# Altium PCB PCBtodojunto.PcbDoc (part 2 of 2)
Units mm, origin at the board's own origin, x right, y up, seen from the top; angles counter-clockwise.
Board outline 200 x 200 mm, 2 copper layers (Top Layer, Bottom Layer); 188 components, 125 nets, 535 pads, 86 vias.
Unrouted connection lines stored in the file: 1.
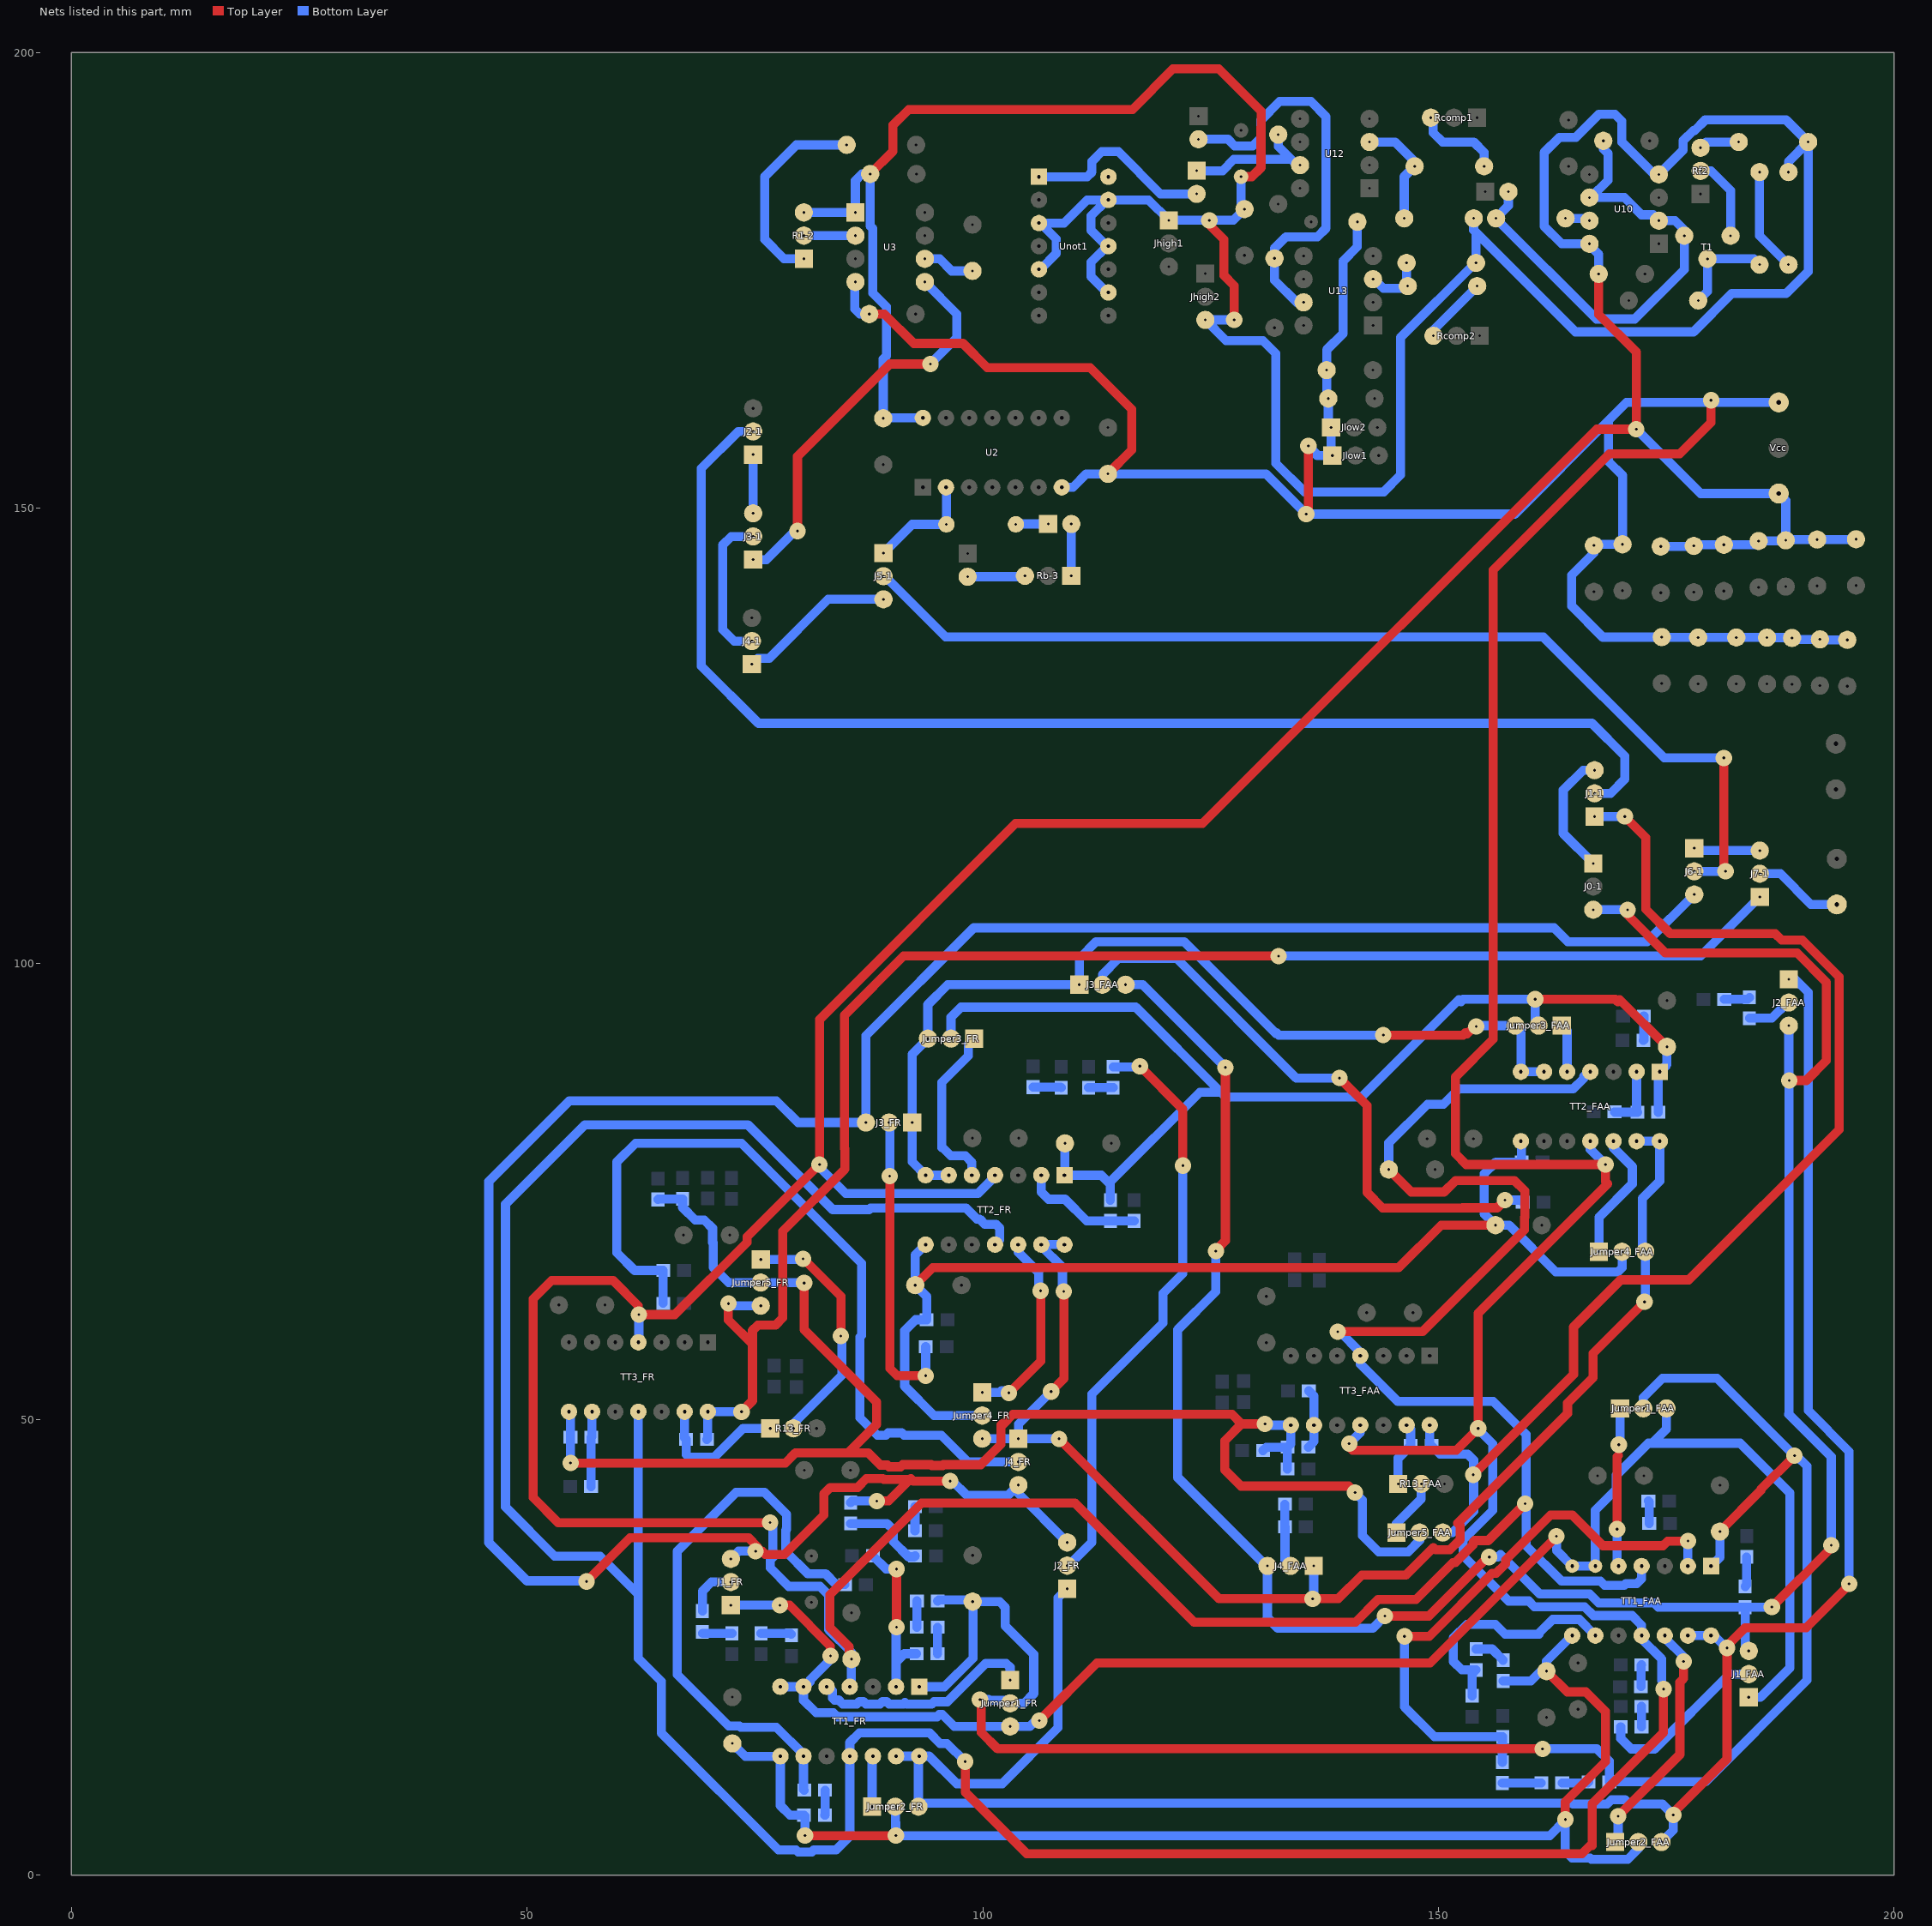
[diagram p2: the nets of this part, all layers, seen from the top]

## Via types
v1: diameter 1.8, hole 0.3, Top Layer to Bottom Layer, 86 vias

## Nets (pads, with @x,y where several pads share a name; then routed paths per layer and width w, separated by ;. In a path a pad name is that pad's centre, name@x,y a point inside that pad or via, vN(x,y) a via of type N, cw(c..) or ccw(c..) an arc to the next point about the centre after c; other vN are vias at no path point) (continued)
NetCf_1: Cf.1 Jsierra.2 R3.1 T1.2 U10.2 U10.6 | length 54.5
  Bottom Layer w1: Jsierra.2@157.684,184.726 157.684,183.202 156.287,181.805 167.336,170.756 171.547,170.756 176.988,176.197 T1.2@176.988,179.9 176.988,180.535 175.972,181.551 U10.2@174.194,181.551 173.554,182.191 172.294,182.191 170.394,184.091 U10.6@166.721,184.091 ; U10.6@166.574,184.091 U10.6@166.721,184.091 ; Cf.1@168.098,190.314 168.098,189.425 168.606,188.917 168.606,185.976 U10.6@166.721,184.091
NetCh_1: Ch.1 U3.6 | length 5.8
  Bottom Layer w1: U3.6@93.65,177.366 95.27,177.366 96.6,176.036 Ch.1@98.88,176.036
NetD1_2: D1.2 D2.1 | length 11.5
  Bottom Layer w1: D2.1@185.243,186.885 185.243,179.9 D1.2@188.418,176.725
NetD2_2: D2.2 Rd.2 T1.1 | length 11
  Bottom Layer w1: Rd.2@178.512,172.788 179.528,173.804 T1.1@179.528,177.36 184.608,177.36 D2.2@185.243,176.725
NetJ0-1_1: J0-1.1 J1-1.3 | length 13.8
  Bottom Layer w1: J0-1.1@167,111.02 163.71,114.31 163.71,119.08 165.88,121.25 J1-1.3@167.14,121.25
NetJ1-1_2: J1-1.2 J2-1.2 | length 141
  Bottom Layer w1: J2-1.2@74.81,158.42 73.18,158.42 69.11,154.35 69.11,132.68 75.4,126.39 166.86,126.39 170.47,122.78 170.47,120.28 168.9,118.71 J1-1.2@167.14,118.71
NetJ1-3_2: J1-3.2 Rb-3.3 | length 6.3
  Bottom Layer w1: J1-3.2@98.344,142.48 104.534,142.48 Rb-3.3@104.634,142.58
NetJ1_FAA_2: J1_FAA.2 R6.b_FAA.1 | length 19.2
  Bottom Layer w1: R6.b_FAA.1@170.011,16.277 170.011,15.016 171.17,13.857 173.73,13.857 181.94,22.067 J1_FAA.2@184.06,22.067
NetJ1_FR_2: J1_FR.2 R6.b_FR.1 | length 5.7
  Bottom Layer w1: R6.b_FR.1@69.244,28.977 69.244,31.167 70.244,32.167 J1_FR.2@72.364,32.167
NetJ2-1_1: J2-1.1 J3-1.3 | length 6.4
  Bottom Layer w1: J3-1.3@74.81,149.44 J2-1.1@74.81,155.88
NetJ2-3_1: J2-3.1 R1-3.1 | length 3.6
  Bottom Layer w1: R1-3.1@103.634,148.23 103.674,148.27 J2-3.1@107.184,148.27
NetJ2-3_2: J2-3.2 Rb-3.1 | length 5.7
  Bottom Layer w1: Rb-3.1@109.714,142.58 109.714,148.26 J2-3.2@109.724,148.27
NetJ2_FAA_2: J2_FAA.2 R10.b_FAA.1 | length 5
  Bottom Layer w1: R10.b_FAA.1@184.134,94.034 186.584,94.034 188.307,95.757 J2_FAA.2@188.454,95.757
NetJ2_FR_2: J2_FR.2 R10.b_FR.1 | length 64.8
  Top Layer w1: v1(117.24,88.77) 121.96,84.05 v1(121.96,77.86)
  Bottom Layer w1: J2_FR.2@109.27,33.97 109.417,33.97 111.98,36.533 111.98,52.78 119.79,60.59 119.79,63.85 121.96,66.02 v1(121.96,77.86) ; R10.b_FR.1@114.314,88.697 v1@117.007,88.697
NetJ3-1_2: J3-1.2 J4-1.2 | length 16.7
  Bottom Layer w1: J4-1.2@74.67,135.42 72.73,135.42 71.48,136.67 71.48,145.97 72.41,146.9 J3-1.2@74.81,146.9
NetJ3_FAA_2: J3_FAA.2 R14_FAA.1 | length 65.5
  Top Layer w1: v1(139.15,87.47) 142.17,84.45 142.17,74.92 143.88,73.21 152.66,73.21 152.677,73.227 156.457,73.227 v1(157.3,74.07) v1@157.094,74.07
  Bottom Layer w1: J3_FAA.2@113.14,97.71 113.14,98.82 114.9,100.58 121.29,100.58 134.4,87.47 v1(139.15,87.47) ; v1(157.3,74.07) 159.037,74.07 R14_FAA.1@159.257,73.85
NetJ3_FR_2: J3_FR.2 R14_FR.1 | length 34.6
  Top Layer w1: J3_FR.2@89.724,82.587 J3_FR.2@89.804,82.507 ; v1(89.804,76.717) 89.804,55.597 90.6,54.801 v1(93.748,54.801)
  Bottom Layer w1: J3_FR.2@89.724,82.587 89.804,82.507 v1(89.804,76.717) ; v1(93.748,54.801) R14_FR.1@93.748,57.984
NetJ4-1_1: J4-1.1 J5-1.3 | length 17.4
  Bottom Layer w1: J4-1.1@74.67,132.88 75.31,133.52 76.57,133.52 83.05,140 J5-1.3@89.11,140
NetJ4_FAA_2: J4_FAA.2 R17.b_FAA.1 R17_FAA.1 | length 7
  Bottom Layer w1: R17_FAA.1@133.161,40.707 133.161,38.227 R17.b_FAA.1@133.171,38.217 133.171,34.55 J4_FAA.2@133.784,33.937
NetJ4_FR_2: J4_FR.2 R17.b_FR.1 R17_FR.1 | length 89.3
  Bottom Layer w1: R17_FR.1@64.941,62.747 R17.b_FR.1@64.941,66.357 61.804,66.357 59.854,68.307 59.854,78.267 61.904,80.317 73.534,80.317 86.72,67.13 86.72,59.243 86.53,59.053 86.53,50.19 88.444,48.277 89.361,48.277 89.614,48.53 91.105,48.53 91.359,48.277 95.454,48.277 98.384,45.347 J4_FR.2@103.914,45.347
NetJ5-1_2: J5-1.2 J6-1.2 | length 116.4
  Top Layer w1: v1(181.33,122.6) 181.33,110.33 v1(181.51,110.15)
  Bottom Layer w1: J5-1.2@89.11,142.54 89.257,142.54 95.927,135.87 161.5,135.87 174.77,122.6 v1(181.33,122.6) ; J6-1.2@178.08,110.15 v1(181.51,110.15)
NetJ6-1_1: J6-1.1 J7-1.3 | length 7.3
  Bottom Layer w1: J6-1.1@178.08,112.69 178.34,112.43 J7-1.3@185.27,112.43
NetJcomp1_1: Jcomp1.1 Rup1.1 U12.7 | length 15.4
  Bottom Layer w1: Jcomp1.1@123.47,187.03 126.313,187.03 127.56,188.277 133.847,188.277 ; Rup1.1@132.43,190.994 132.43,189.694 133.847,188.277 ; U12.7@134.824,187.647 134.477,187.647 133.847,188.277
NetJcomp1_2: Jcomp1.2 Unot1.1 | length 21
  Bottom Layer w1: Unot1.1@106.17,186.37 111.457,186.37 111.99,186.903 111.99,188.04 113.07,189.12 114.884,189.12 119.514,184.49 Jcomp1.2@123.47,184.49
NetJcomp2_2: Jcomp2.2 Rup2.1 U13.7 | length 44.6
  Bottom Layer w1: Jcomp2.2@123.68,190.484 126.916,190.484 127.643,189.757 129.633,189.757 130.53,190.654 130.53,192.574 132.583,194.627 136.007,194.627 137.68,192.954 137.68,180.741 136.713,179.774 133.27,179.774 132.02,178.524 Rup2.1@132.02,177.414 132.02,175.034 134.46,172.594 U13.7@135.21,172.594
NetJumper1_FAA_1: Jumper1_FAA.1 TT1_FAA.5 | length 17.2
  Top Layer w1: v1(169.61,37.96) 169.61,45.907 169.764,46.061
  Bottom Layer w1: v1(169.61,37.96) 169.61,34.069 TT1_FAA.5@169.764,33.916 ; v1(169.8,47.23) 169.8,46.946 169.95,46.797 Jumper1_FAA.1@169.95,51.217
NetJumper1_FR_1: Jumper1_FR.1 TT1_FR.5 | length 25.4
  Bottom Layer w1: TT1_FR.5@82.874,20.677 83.08,20.677 83.514,20.243 83.514,19.436 83.733,19.217 84.187,19.217 84.627,18.777 86.201,18.777 86.451,19.027 86.917,19.027 87.167,18.777 88.741,18.777 88.991,19.027 89.457,19.027 89.707,18.777 91.281,18.777 91.471,18.967 91.661,18.777 94.406,18.777 94.656,19.027 96.124,19.027 100.327,23.23 102.58,23.23 103.01,22.8 Jumper1_FR.1@103.01,21.4
NetJumper2_FAA_1: Jumper2_FAA.1 TT1_FAA.12 | length 26.6
  Top Layer w1: v1(169.73,6.477) 176.5,13.247 176.5,21.166 176.91,21.576 v1(176.91,23.44)
  Bottom Layer w1: Jumper2_FAA.1@169.4,3.637 169.73,3.967 v1(169.73,6.477) ; TT1_FAA.12@174.844,26.296 174.844,26.046 176.91,23.98 v1(176.91,23.44)
NetJumper2_FR_1: Jumper2_FR.1 TT1_FR.12 | length 5.6
  Bottom Layer w1: Jumper2_FR.1@87.864,7.517 87.864,12.967 TT1_FR.12@87.954,13.057
NetJumper3_FAA_1: Jumper3_FAA.1 TT2_FAA.5 | length 5.3
  Bottom Layer w1: Jumper3_FAA.1@163.53,93.227 164.134,92.623 TT2_FAA.5@164.134,88.16
NetJumper3_FR_1: Jumper3_FR.1 TT2_FR.5 | length 19.1
  Bottom Layer w1: TT2_FR.5@98.549,76.811 TT2_FR.5@98.812,76.811 98.812,78.218 98.09,78.94 96.49,78.94 95.59,79.84 95.52,79.84 95.52,86.993 98.424,89.897 98.424,91.157 Jumper3_FR.1@99.064,91.797
NetJumper4_FAA_1: Jumper4_FAA.1 TT2_FAA.12 | length 14.5
  Bottom Layer w1: Jumper4_FAA.1@167.62,68.407 167.62,72.197 171.28,75.857 171.28,77.75 169.214,79.816 TT2_FAA.12@169.214,80.54
NetJumper4_FR_1: Jumper4_FR.1 TT2_FR.12 | length 21.5
  Top Layer w1: v1(102.88,52.92) 106.36,56.4 v1(106.36,64.12)
  Bottom Layer w1: Jumper4_FR.1@99.944,52.977 101.887,52.977 102.07,53.16 v1@102.65,53.16 ; TT2_FR.12@103.892,69.191 103.892,68.378 106.14,66.13 106.14,64.34 v1(106.36,64.12)
NetJumper5_FAA_1: Jumper5_FAA.1 R13_FAA.2 | length 6.5
  Bottom Layer w1: Jumper5_FAA.1@145.404,37.597 145.404,38.567 148.124,41.287 R13_FAA.2@148.124,42.937
NetJumper5_FR_1: Jumper5_FR.1 R13_FR.2 | length 26.7
  Top Layer w1: v1(80.3,67.64) 84.44,63.5 v1(84.44,59.17)
  Bottom Layer w1: Jumper5_FR.1@75.644,67.567 v1@80.037,67.567 ; R13_FR.2@79.224,49.027 79.224,49.534 84.54,54.85 v1@84.54,58.98
NetR1-2_1: R1-2.1 R2-2.2 | length 22.5
  Bottom Layer w1: R1-2.1@80.37,177.376 78.2,177.376 76.07,179.506 76.07,186.386 79.55,189.866 R2-2.2@85.07,189.866
NetR1-2_2: R1-2.2 U3.2 | length 5.7
  Bottom Layer w1: R1-2.2@80.37,179.916 86.02,179.916 U3.2@86.03,179.906
NetR1.b_FAA_2: R1.b_FAA.2 R1_FAA.1 | length 2.4
  Bottom Layer w1: R1.b_FAA.2@172.227,20.687 172.227,23.007 R1_FAA.1@172.297,23.077
NetR1.b_FR_2: R1.b_FR.2 R1_FR.1 | length 3.4
  Bottom Layer w1: R1.b_FR.2@75.674,26.54 78.904,26.54 R1_FR.1@79.004,26.44
NetR2.b_FAA_1: R2.b_FAA.1 R2_FAA.2 | length 2.5
  Bottom Layer w1: R2_FAA.2@173.047,41.057 173.147,40.957 R2.b_FAA.1@173.147,38.607
NetR2.b_FR_1: R2.b_FR.1 R2_FR.2 | length 2.6
  Bottom Layer w1: R2_FR.2@92.561,37.787 R2.b_FR.1@92.561,40.437
NetR3.b_FAA_2: R3.b_FAA.2 R3_FAA.1 | length 3.3
  Bottom Layer w1: R3.b_FAA.2@183.664,31.69 183.834,31.86 R3_FAA.1@183.834,34.924
NetR3.b_FR_2: R3.b_FR.2 R3_FR.1 | length 9.4
  Bottom Layer w1: R3.b_FR.2@85.504,38.594 89.497,38.594 90.184,37.907 90.184,36.607 91.864,34.927 92.474,34.927 R3_FR.1@92.574,35.027
NetR3_2: R3.2 U10.7 | length 2.8
  Bottom Layer w1: R3.2@163.907,181.805 R3.2@163.951,181.805 166.32,181.805 U10.7@166.574,181.551
NetR4.b_FAA_1: R4.b_FAA.1 R4_FAA.1 | length 4.3
  Bottom Layer w1: R4_FAA.1@157.02,10.114 161.284,10.114 R4.b_FAA.1@161.297,10.127
NetR4.b_FAA_2: R4.b_FAA.2 R4.c_FAA.1 | length 2.9
  Bottom Layer w1: R4.b_FAA.2@163.583,10.127 166.367,10.127 R4.c_FAA.1@166.477,10.237
NetR4.b_FR_1: R4.b_FR.1 R4_FR.1 | length 2.9
  Bottom Layer w1: R4_FR.1@95.03,24.297 95.047,24.314 R4.b_FR.1@95.047,27.207
NetR4.b_FR_2: R4.b_FR.2 R4.c_FR.1 | length 2.9
  Bottom Layer w1: R4.b_FR.2@92.761,27.207 92.774,27.22 R4.c_FR.1@92.774,30.087
NetR4_FAA_2: R4_FAA.2 R5_FAA.2 TT1_FAA.2 | length 63.7
  Top Layer w1: v1(146.28,26.2) 148.99,26.2 155.9,33.11 156.325,33.11 157.38,34.164 157.38,34.59 162.31,39.52 164.69,39.52 168.05,36.16 174.65,36.16 175.151,36.661 v1(177.384,36.661)
  Bottom Layer w1: v1@146.28,25.98 146.28,18.47 149.566,15.184 R5_FAA.2@157.06,15.184 157.02,15.144 R4_FAA.2@157.02,12.4 ; TT1_FAA.2@177.384,33.916 v1(177.384,36.661)
NetR4_FR_2: R4_FR.2 R5_FR.2 TT1_FR.2 | length 18.6
  Top Layer w1: v1(90.544,27.227) v1(90.544,33.587) v1@90.544,33.707
  Bottom Layer w1: R5_FR.2@87.947,35.047 89.407,33.587 v1(90.544,33.587) ; TT1_FR.2@90.494,20.677 90.494,23.397 ; v1@90.494,27.017 90.494,23.397 ; R4_FR.2@92.744,24.297 91.394,24.297 90.494,23.397
NetR6.b_FAA_2: R6.b_FAA.2 R6_FAA.1 | length 2.2
  Bottom Layer w1: R6.b_FAA.2@172.297,16.277 R6_FAA.1@172.297,18.527
NetR6.b_FR_2: R6.b_FR.2 R6_FR.1 | length 3.2
  Bottom Layer w1: R6.b_FR.2@69.276,26.52 72.464,26.52 R6_FR.1@72.484,26.54
NetR6_2: R6.2 Rcomp2.3 | length 7.7
  Bottom Layer w1: Rcomp2.3@149.46,168.924 149.46,169.574 R6.2@154.26,174.374 R6.2@154.04,174.374
NetR7.b_FAA_1: R7.b_FAA.1 R7_FAA.1 | length 3.5
  Bottom Layer w1: R7.b_FAA.1@154.14,24.81 155.897,24.81 157.1,23.607 R7_FAA.1@157.1,23.59
NetR7.b_FAA_2: R7.b_FAA.2 R8_FAA.2 TT1_FAA.9 | length 26.6
  Bottom Layer w1: R8_FAA.2@153.71,19.68 153.71,22.094 R7.b_FAA.2@154.14,22.524 152.583,22.524 151.65,23.457 151.65,26.037 153.14,27.527 156.25,27.527 157.327,26.45 161.06,26.45 161.06,26.567 162.559,28.066 165.454,28.066 TT1_FAA.9@167.224,26.296
NetR7.b_FR_1: R7.b_FR.1 R7_FR.1 | length 2.7
  Bottom Layer w1: R7_FR.1@82.68,6.587 82.7,6.607 R7.b_FR.1@82.7,9.327
NetR7.b_FR_2: R7.b_FR.2 R8_FR.2 TT1_FR.9 | length 62.8
  Bottom Layer w1: R7.b_FR.2@80.414,9.327 80.334,9.407 TT1_FR.9@80.334,13.057 80.334,13.266 77.36,16.24 73.427,16.24 73.311,16.357 72.123,16.357 66.47,22.01 66.47,35.54 72.94,42.01 76.05,42.01 78.474,39.586 78.474,37.941 78.38,37.848 78.38,35.517 80.807,33.09 82.727,33.09 83.937,31.88 R8_FR.2@84.887,31.88
NetR7_2: R7.2 Rcomp1.3 | length 9.8
  Bottom Layer w1: Rcomp1.3@149.175,192.854 149.429,192.6 149.429,191.203 150.445,190.187 153.874,190.187 155.017,189.044 R7.2@155.017,187.52
NetR9.b_FAA_2: R9.b_FAA.2 R9_FAA.1 | length 2.7
  Bottom Layer w1: R9_FAA.1@172.497,91.597 172.547,91.647 R9.b_FAA.2@172.547,94.277
NetR9.b_FR_2: R9.b_FR.2 R9_FR.1 | length 3.1
  Bottom Layer w1: R9_FR.1@105.534,86.481 108.544,86.481 R9.b_FR.2@108.614,86.411
NetR10.b_FAA_2: R10.b_FAA.2 R10_FAA.1 | length 2.8
  Bottom Layer w1: R10_FAA.1@181.38,96.107 183.921,96.107 R10.b_FAA.2@184.134,96.32
NetR10.b_FR_2: R10.b_FR.2 R10_FR.1 | length 2.7
  Bottom Layer w1: R10_FR.1@111.604,86.411 R10.b_FR.2@114.314,86.411
NetR11_FAA_2: R11_FAA.2 R12_FAA.2 TT2_FAA.2 | length 7
  Bottom Layer w1: R12_FAA.2@169.323,83.757 169.363,83.717 R11_FAA.2@171.847,83.717 171.754,83.81 TT2_FAA.2@171.754,88.16
NetR11_FR_2: R11_FR.2 R12_FR.2 TT2_FR.2 | length 13.3
  Bottom Layer w1: TT2_FR.2@106.432,76.811 106.432,74.966 107.224,74.174 109.034,74.174 111.42,71.788 R11_FR.2@114.004,71.788 114.014,71.798 R12_FR.2@116.615,71.798
NetR13_FAA_1: R13_FAA.1 R15_FAA.1 TT3_FAA.13 | length 7.2
  Bottom Layer w1: R13_FAA.1@145.584,42.937 145.584,45.76 R15_FAA.1@146.961,47.137 146.961,48.929 TT3_FAA.13@146.514,49.376
NetR13_FR_1: R13_FR.1 R15_FR.1 TT3_FR.13 | length 15.4
  Bottom Layer w1: TT3_FR.13@67.292,50.85 67.292,47.986 R15_FR.1@67.451,47.827 67.451,46.14 67.744,45.847 70.514,45.847 73.694,49.027 R13_FR.1@76.684,49.027
NetR19_FAA_2: R19_FAA.2 R21_FAA.1 TT3_FAA.9 | length 6.7
  Bottom Layer w1: R21_FAA.1@135.727,46.967 136.354,47.594 TT3_FAA.9@136.354,49.376 136.354,52.57 R19_FAA.2@135.787,53.137
NetR19_FR_2: R19_FR.2 R21_FR.1 TT3_FR.9 | length 8.4
  Bottom Layer w1: R19_FR.2@57.027,42.637 57.027,48.027 R21_FR.1@57.057,48.057 57.132,48.132 TT3_FR.9@57.132,50.85 TT3_FR.9@57.057,50.775
NetRf1_1: Rf1.1 Rf2.3 | length 4.5
  Bottom Layer w1: Rf2.3@178.766,189.552 179.401,190.187 Rf1.1@182.957,190.187
NetRf2_2: Rf2.2 T1.3 | length 9.1
  Bottom Layer w1: Rf2.2@178.766,187.012 179.909,187.012 182.068,184.853 T1.3@182.068,179.9
Output: J7-1.2 Output.2 | length 9.8
  Bottom Layer w1: J7-1.2@185.27,109.89 187.52,109.89 190.88,106.53 Output.2@193.72,106.53
Output1: J3-1.1 U3.5 | length 44.1
  Top Layer w1: v1(79.68,147.49) 79.68,155.68 89.82,165.82 v1(94.25,165.82)
  Bottom Layer w1: J3-1.1@74.81,144.36 76.25,144.36 v1@79.11,147.22 ; U3.5@93.65,174.826 97.16,171.316 97.16,168.73 v1(94.25,165.82)
Output2: J5-1.1 R1-3.2 U2.2 | length 12.3
  Bottom Layer w1: J5-1.1@89.11,145.08 92.26,148.23 R1-3.2@96.014,148.23 96.014,152.25 U2.2@95.974,152.29
VCC: Unot1.14
Vcc+_FAA: Ccoup1-2.1 Ccoup1-3.1 Ccoup1-4.1 Ccoup1.1 Ccoup2-4.1 Ccoup2.1 Ccoup3-4.1 Ccoup3.1 CD1_FAA.1 CD1_FR.1 CD2_FAA.1 CD2_FR.1 CD3_FAA.1 CD3_FR.1 D1.1 Jhigh1.1 Jhigh2.3 R1-2.3 R4.2 R5.2 Rf1.2 TT1_FAA.4 TT1_FR.4 TT2_FAA.4 TT2_FR.4 TT3_FAA.4 TT3_FR.4 U2.14 U3.1 U10.4 U10.8 Unot1.3 Unot1.5 Unot1.9 Unot1.11 Unot1.13 Vcc.3 | length 919
  Top Layer w1: v1@62.212,61.695 62.212,62.489 59.444,65.257 52.684,65.257 50.664,63.237 50.664,41.447 53.424,38.687 v1(76.674,38.687) ; v1(62.27,61.51) 66.208,61.51 66.211,61.507 74.154,69.45 74.154,70.054 v1(82.09,77.99) 82.09,93.89 103.6,115.4 124.12,115.4 167.39,158.67 v1(171.72,158.67) 171.72,167.14 167.59,171.27 Ccoup1-4.1@167.59,175.709 ; CD1_FR.1@85.594,23.707 85.345,23.955 85.345,25.055 83.23,27.17 83.23,30.76 93.31,40.84 110.12,40.84 123.19,27.77 140.909,27.77 143.384,30.245 147.535,30.245 151.587,34.297 151.851,34.297 153.784,36.23 153.784,36.494 154.005,36.715 155.475,36.715 v1(159.52,40.76) ; Ccoup1-2.1@87.65,186.676 90.16,189.186 90.16,192.04 91.87,193.75 116.43,193.75 120.88,198.2 125.91,198.2 130.55,193.56 130.55,191.801 130.53,191.781 130.53,187.37 129.537,186.377 Ccoup3-4.1@128.347,186.377 ; v1(124.87,181.584) 124.87,181.094 126.46,179.504 126.46,175.554 127.6,174.414 v1(127.6,170.664) ; v1(138.97,59.64) 148.27,59.64 159.444,70.814 159.444,72.16 159.49,72.207 159.49,75.08 158.34,76.23 151.89,76.23 150.63,74.97 147.026,74.97 CD1_FAA.1@144.56,77.437
  Bottom Layer w1: TT3_FR.4@62.212,58.47 62.084,58.598 62.27,58.784 v1(62.27,61.51) ; v1(76.674,38.687) 76.98,38.38 76.98,34.937 76.999,34.918 76.674,34.593 76.674,33.716 78.7,31.69 82.147,31.69 83.11,30.727 83.11,26.94 85.594,24.456 CD1_FR.1@85.594,23.707 85.594,20.857 TT1_FR.4@85.414,20.677 ; R1-2.3@80.37,182.456 86.02,182.456 U3.1@86.03,182.446 86.03,185.936 86.77,186.676 Ccoup1-2.1@87.65,186.676 87.65,180.973 87.93,180.693 87.93,173.613 89.45,172.093 89.45,166.716 89.084,166.35 Ccoup1-3.1@89.084,159.87 89.124,159.91 U2.14@93.434,159.91 ; v1@82.09,77.67 84.96,74.8 99.488,74.8 101.352,76.664 TT2_FR.4@101.352,76.811 ; Unot1.5@106.17,176.21 106.317,176.21 108.07,177.963 108.07,179.537 Unot1.3@106.317,181.29 ; Unot1.3@106.17,181.29 Unot1.3@106.317,181.29 ; Unot1.9@113.79,173.67 113.643,173.67 111.89,175.423 111.89,176.997 Unot1.11@113.643,178.75 ; Unot1.11@113.79,178.75 Unot1.11@113.643,178.75 ; v1(127.6,170.664) Jhigh2.3@124.43,170.664 126.7,168.394 130.733,168.394 132.15,166.977 132.15,154.944 135.3,151.794 144,151.794 145.86,153.654 145.86,168.734 154.04,176.914 R5.2@154.13,176.914 154.13,180.029 154.255,180.154 ; Ccoup3-4.1@128.347,186.377 128.347,183.202 Ccoup2-4.1@128.728,182.821 127.501,181.594 Jhigh1.1@120.43,181.594 118.194,183.83 Unot1.13@113.79,183.83 Unot1.13@113.643,183.83 ; v1(138.97,59.64) 139.17,59.64 141.434,57.376 TT3_FAA.4@141.434,56.996 141.434,56.096 145.543,51.987 156.004,51.987 159.64,48.351 159.64,40.88 v1(159.52,40.76) 159.64,40.64 159.64,36.147 163.521,32.266 167.784,32.266 168.24,31.81 170.39,31.81 170.577,31.997 171.777,31.997 172.304,32.524 TT1_FAA.4@172.304,33.916 ; CD1_FAA.1@144.56,77.437 144.56,80.357 148.8,84.597 150.56,84.597 152.233,86.27 164.789,86.27 165.934,87.414 165.934,87.626 166.467,88.16 TT2_FAA.4@166.674,88.16 ; R4.2@153.874,181.805 153.874,180.535 154.255,180.154 ; Ccoup1-4.1@167.59,175.709 167.59,177.868 166.574,178.884 U10.8@166.574,179.011 163.526,179.011 161.594,180.943 161.594,189.017 163.277,190.7 165.075,190.7 167.61,193.235 169.368,193.235 170.13,192.473 170.13,190.187 173.686,186.631 U10.4@174.194,186.631 176.866,189.303 176.866,190.339 177.979,191.452 178.126,191.452 179.274,192.6 188.164,192.6 Rf1.2@190.577,190.187 ; v1(171.72,158.67) 178.78,151.61 Vcc.3@187.35,151.61 188.12,150.84 CD2_FAA.1@188.12,146.48 ; Ccoup2.1@174.4,145.8 177.97,145.8 Ccoup1.1@178.03,145.86 178.16,145.99 Ccoup3.1@181.33,145.99 184.73,145.99 CD3_FAA.1@185.14,146.4 188.04,146.4 CD2_FAA.1@188.12,146.48 ; D1.1@188.418,186.885 188.418,188.028 Rf1.2@190.577,190.187 ; CD2_FR.1@195.83,146.594 195.798,146.562 CD3_FR.1@191.562,146.562 188.202,146.562 CD2_FAA.1@188.12,146.48 ; Unot1.3@106.317,181.29 108.92,181.29 111.46,183.83 Unot1.13@113.643,183.83 ; Unot1.11@113.643,178.75 111.89,180.503 111.89,182.077 Unot1.13@113.643,183.83 ; 154.255,180.154 165.053,169.356 178.001,169.356 182.195,173.55 188.164,173.55 190.577,175.963 Rf1.2@190.577,190.187
Vcc-_FAA: Ccoup2-2.1 Ccoup2-3.1 Ccoup4-4.1 Ccoup4.1 Ccoup5-5.1 Ccoup5.1 Ccoup6-5.1 Ccoup6.1 CD4_FAA.1 CD4_FR.1 CD5_FAA.1 CD5_FR.1 CD6_FAA.1 CD6_FR.1 Jlow1.1 Jlow2.1 TT1_FAA.11 TT1_FR.11 TT2_FAA.11 TT2_FR.11 TT3_FAA.11 TT3_FR.11 U2.7 U3.4 Vcc.1 | length 745.3
  Top Layer w1: Ccoup2-2.1@87.55,171.306 89.214,171.306 92.44,168.08 97.83,168.08 100.49,165.42 111.79,165.42 116.35,160.86 116.35,156.376 Ccoup2-3.1@113.744,153.77 ; v1(98.08,12.46) 98.08,9.1 104.84,2.34 165.76,2.34 166.66,3.24 166.89,3.24 166.89,7.83 174.7,15.64 v1(174.7,20.42) ; v1(135.5,149.36) 135.73,149.59 v1(135.73,156.844) ; v1(140.21,47.35) 140.21,47.01 140.593,46.627 151.97,46.627 v1(154.36,49.017) 154.36,61.656 168.57,75.866 168.34,76.095 v1(168.34,77.98) 153.056,77.98 151.86,79.177 151.86,87.58 156.02,91.74 156.02,143.22 168.75,155.95 176.47,155.95 179.92,159.4 v1(179.92,161.84)
  Bottom Layer w1: TT3_FR.11@62.212,50.85 62.212,30.82 ; U3.4@86.03,174.826 85.96,174.756 85.96,171.876 86.53,171.306 Ccoup2-2.1@87.55,171.306 ; v1(98.08,12.46) 96.083,14.457 95.333,14.457 94.17,15.62 86.48,15.62 85.414,14.554 TT1_FR.11@85.414,13.057 85.414,4.267 83.907,2.76 81.462,2.76 81.239,2.537 79.748,2.537 79.525,2.76 77.57,2.76 64.74,15.59 64.74,21.263 62.212,23.792 62.212,30.82 ; TT2_FR.11@101.352,69.191 101.87,69.709 101.87,71.02 101.46,71.43 100.232,71.43 99.664,71.998 99.372,71.998 98.17,73.2 87.69,73.2 87.53,73.04 83.53,73.04 74.22,82.35 56.35,82.35 47.63,73.63 47.63,40.41 53.03,35.01 58,35.01 62.19,30.82 62.212,30.82 ; U2.7@108.674,152.29 109.894,152.29 111.374,153.77 Ccoup2-3.1@113.744,153.77 131.09,153.77 v1(135.5,149.36) 158.39,149.36 168.67,159.64 ; v1(135.73,156.844) 136.7,155.874 136.7,155.784 Jlow1.1@138.37,155.784 138.22,155.934 Jlow2.1@138.22,158.864 137.92,159.164 Ccoup5-5.1@137.92,162.034 137.74,162.214 Ccoup6-5.1@137.74,165.154 137.74,167.374 139.53,169.164 139.53,177.114 141.11,178.694 Ccoup4-4.1@141.11,181.424 ; v1(140.21,47.35) 141.434,48.574 TT3_FAA.11@141.434,49.376 ; v1(154.36,49.017) 154.36,48.93 155.95,47.34 155.95,40.023 152.71,36.783 152.71,35.06 157.69,30.08 159.92,30.08 160.534,29.466 166.034,29.466 167.019,28.48 171.24,28.48 172.304,27.416 TT1_FAA.11@172.304,26.296 172.304,25.936 174.513,23.727 174.513,21.364 ; TT2_FAA.11@166.88,80.54 TT2_FAA.11@166.674,80.54 166.674,79.646 v1(168.34,77.98) ; Vcc.1@187.35,161.61 170.64,161.61 168.67,159.64 ; Ccoup6.1@194.87,135.55 191.93,135.55 CD4_FAA.1@191.87,135.61 188.96,135.61 CD5_FAA.1@188.81,135.76 188.77,135.8 CD6_FAA.1@186.064,135.8 186.05,135.814 CD4_FR.1@182.69,135.814 CD5_FR.1@178.5,135.814 174.55,135.814 CD6_FR.1@174.51,135.854 168.036,135.854 164.61,139.28 164.61,142.64 167.07,145.1 Ccoup5.1@167.07,145.91 167.2,146.04 Ccoup4.1@170.21,146.04 170.21,153.59 168.67,155.13 168.67,159.64
Vi_FAA: J0-1.3 J1_FAA.3 J2_FAA.3 J3_FAA.3 J4_FAA.3 R3.b_FAA.1 | length 258.7
  Top Layer w1: v1(125.58,68.49) 126.02,68.93 126.02,69.02 126.63,69.63 v1(126.63,88.63) ; v1(144.13,28.44) 148.94,28.44 155.58,35.08 v1(155.58,34.91) ; v1(170.77,105.94) 170.77,105.33 174.9,101.2 189.36,101.2 192.58,97.98 192.58,89.4 190.38,87.2 v1(188.49,87.2) ; v1(186.59,29.427) v1@192.93,35.767
  Bottom Layer w1: J3_FAA.3@115.68,97.71 117.55,97.71 v1(126.63,88.63) ; v1(125.58,68.49) 125.58,64.04 121.4,59.86 121.4,43.64 131.103,33.937 J4_FAA.3@131.244,33.937 131.244,28.246 132.41,27.08 142.78,27.08 v1@144.1,28.4 ; v1(155.58,34.91) 156.53,34.91 156.8,35.18 161.114,30.866 166.613,30.866 167.599,29.88 173.656,29.88 174.133,29.404 R3.b_FAA.1@183.664,29.404 ; J0-1.3@167,105.94 v1(170.77,105.94) ; J1_FAA.3@184.06,24.607 183.664,25.003 R3.b_FAA.1@183.664,29.404 ; v1@186.367,29.404 R3.b_FAA.1@183.664,29.404 ; J2_FAA.3@188.454,93.217 188.454,87.236 v1(188.49,87.2) 188.49,50.619 188.454,50.583 193.11,45.927 v1(193.11,36.187)
Vi_FR: J1_FR.3 J2_FR.3 J3_FR.3 J4_FR.3 J6-1.3 R3.b_FR.1 | length 282.2
  Top Layer w1: v1(56.52,32.22) 61.31,37.01 74.31,37.01 75.27,36.05 75.08,35.86 v1(75.08,35.55) 75.77,35.55 76.14,35.18 78.23,35.18 82.574,39.524 82.574,41.847 83.274,42.547 86.281,42.547 87.241,43.507 89.043,43.507 89.138,43.412 92.019,43.412 ; v1(88.384,41.057) 89.664,41.057 92.019,43.412 ; v1(96.434,43.242) 92.379,43.242 92.114,43.507 92.019,43.412
  Bottom Layer w1: v1(56.52,32.22) 56.44,32.3 49.99,32.3 45.8,36.49 45.8,76.13 54.64,84.97 77.36,84.97 79.743,82.587 J3_FR.3@87.184,82.587 87.184,92.124 99.01,103.95 162.68,103.95 164.19,102.44 172.91,102.44 J6-1.3@178.08,107.61 ; J1_FR.3@72.364,34.707 73.207,35.55 v1(75.08,35.55) ; R3.b_FR.1@85.504,40.88 85.681,41.057 v1(88.384,41.057) ; v1(96.434,43.242) 96.699,43.242 98.284,41.657 102.764,41.657 J4_FR.3@103.914,42.807 103.914,41.866 J2_FR.3@109.27,36.51
Vo(E1): J1_FAA.1 J1_FR.1 Jumper1_FAA.3 Jumper1_FR.3 TT1_FAA.6 TT1_FAA.7 TT1_FR.6 TT1_FR.7 | length 183.9
  Top Layer w1: v1(77.744,29.627) 78.794,29.627 83.29,25.131 v1(83.29,24.06) ; v1(106.21,16.96) 112.53,23.28 149.1,23.28 v1@162.74,36.92
  Bottom Layer w1: J1_FR.1@72.364,29.627 v1(77.744,29.627) ; TT1_FR.7@77.794,20.677 TT1_FR.6@80.334,20.677 ; v1(83.29,24.06) 83.29,23.639 81.074,21.422 81.074,21.21 80.54,20.677 TT1_FR.6@80.334,20.677 ; v1@105.6,16.75 105.17,16.32 Jumper1_FR.3@103.01,16.32 96.87,16.32 95.563,17.627 95.236,17.627 94.986,17.377 84.047,17.377 83.607,17.817 81.724,17.817 80.334,19.207 TT1_FR.6@80.334,20.677 ; v1(162.96,37.19) 162.96,35.639 TT1_FAA.7@164.684,33.916 TT1_FAA.6@167.224,33.916 167.224,40.034 169.52,42.33 169.52,43.877 173.04,47.397 173.47,47.397 ; Jumper1_FAA.3@175.03,51.217 175.03,48.957 173.47,47.397 ; J1_FAA.1@184.06,19.527 185.34,19.527 188.56,22.747 188.56,41.947 183.11,47.397 173.47,47.397
Vo(E2)_FAA: J2_FAA.1 J2_FR.1 Jumper2_FAA.3 Jumper2_FR.3 TT1_FAA.13 TT1_FAA.14 TT1_FR.13 TT1_FR.14 | length 240.6
  Top Layer w1: v1@175.89,6.957 181.68,12.747 v1(181.68,24.937) 181.68,25.177 183.65,27.147 190.36,27.147 v1@194.79,31.577
  Bottom Layer w1: TT1_FR.13@90.494,13.057 TT1_FR.14@93.034,13.057 ; J2_FR.1@109.27,31.43 108.27,30.43 108.27,16.17 102.14,10.04 97.14,10.04 94.123,13.057 TT1_FR.14@93.034,13.057 ; Jumper2_FAA.3@174.48,3.637 175.78,4.937 v1(175.78,6.607) 174.576,7.81 170.942,7.81 170.475,8.277 168.984,8.277 168.517,7.81 164.776,7.81 164.676,7.91 93.337,7.91 Jumper2_FR.3@92.944,7.517 92.944,12.967 TT1_FR.14@93.034,13.057 ; TT1_FAA.13@177.384,26.296 TT1_FAA.14@179.924,26.296 180.241,26.296 v1@181.41,25.127 ; J2_FAA.1@188.454,98.297 189.16,98.297 190.58,96.877 190.58,50.987 195.07,46.497 v1(195.07,31.977)
Vo(E3): J3_FAA.1 J3_FR.1 Jumper3_FAA.3 Jumper3_FR.3 TT2_FAA.6 TT2_FAA.7 TT2_FR.6 TT2_FR.7 | length 104.3
  Top Layer w1: v1(143.96,92.18) 152.71,92.18 152.98,92.45 153.13,92.3 153.95,93.12 v1(154.15,93.12)
  Bottom Layer w1: TT2_FR.6@96.272,76.811 TT2_FR.7@93.732,76.811 92.264,78.279 J3_FR.1@92.264,82.587 92.264,90.077 Jumper3_FR.3@93.984,91.797 93.984,95.534 96.16,97.71 J3_FAA.1@110.6,97.71 110.6,100.59 112.45,102.44 122.1,102.44 132.16,92.38 132.23,92.45 132.5,92.18 v1(143.96,92.18) 143.96,92.31 v1@143.89,92.38 ; v1@154.327,93.227 Jumper3_FAA.3@158.45,93.227 159.054,92.623 TT2_FAA.7@159.054,88.16 TT2_FAA.6@161.594,88.16
Vo(E4)_FAA: J4_FAA.1 J4_FR.1 Jumper4_FAA.3 Jumper4_FR.3 TT2_FAA.13 TT2_FAA.14 TT2_FR.13 TT2_FR.14 | length 148.2
  Top Layer w1: v1(107.5,53.07) 108.93,54.5 108.9,54.53 v1(108.9,64.04) ; v1(108.363,47.887) 125.92,30.33 v1(136.2,30.33) 139.01,30.33 141.62,32.94 146.44,32.94 149.447,35.947 149.697,35.697 151.271,35.697 152.384,36.81 152.384,38.384 152.134,38.634 164.18,50.68 164.18,51.8 166.98,54.6 166.98,57.27 v1(172.62,62.91)
  Bottom Layer w1: Jumper4_FR.3@99.944,47.897 99.954,47.887 J4_FR.1@103.914,47.887 ; v1(107.5,53.07) 103.914,49.484 J4_FR.1@103.914,47.887 ; v1(108.363,47.887) J4_FR.1@103.914,47.887 ; v1(108.9,64.04) 108.75,64.19 108.75,66.71 106.432,69.028 TT2_FR.13@106.432,69.191 TT2_FR.14@108.972,69.191 ; v1@136.324,30.534 J4_FAA.1@136.324,33.937 ; TT2_FAA.13@171.754,80.54 TT2_FAA.14@174.294,80.54 174.294,76.171 172.39,74.267 172.39,68.717 Jumper4_FAA.3@172.7,68.407 v1@172.7,63.45
Vo(E5)_FAA: J1-1.1 Jumper5_FAA.3 R15_FAA.2 TT3_FAA.14 | length 131.9
  Top Layer w1: v1(153.82,43.94) 164.83,54.95 164.83,60.15 170.01,65.33 177.48,65.33 193.98,81.83 193.98,98.56 189.94,102.6 187.68,102.6 186.98,103.3 175.46,103.3 172.77,105.99 172.77,113.86 v1(170.46,116.17)
  Bottom Layer w1: TT3_FAA.14@149.054,49.376 149.054,47.33 R15_FAA.2@149.247,47.137 150.167,46.217 153.184,46.217 153.874,45.527 153.874,39.927 151.544,37.597 Jumper5_FAA.3@150.484,37.597 ; J1-1.1@167.14,116.17 v1(170.46,116.17)
Vo(E5)_FR: J7-1.1 Jumper5_FR.3 R15_FR.2 TT3_FR.14 | length 170.8
  Top Layer w1: v1(72.09,62.72) 72.09,60.93 74.74,58.28 ; v1(73.53,50.85) 74.74,52.06 74.74,58.28 ; v1(132.47,100.86) 91.33,100.86 84.83,94.36 84.83,79.76 84.88,79.71 84.88,77.47 78.06,70.65 78.06,61.15 77.28,60.37 75.34,60.37 74.74,59.77 74.74,58.28
  Bottom Layer w1: R15_FR.2@69.737,47.827 69.832,47.922 TT3_FR.14@69.832,50.85 v1(73.53,50.85) ; v1@72.117,62.487 Jumper5_FR.3@75.644,62.487 ; v1(132.47,100.86) v1@132.49,100.86 ; v1@132.73,100.86 178.78,100.86 J7-1.1@185.27,107.35
Vo(J1): C2_FAA.2 C2_FR.2 Jumper1_FAA.2 Jumper1_FR.2 R4.c_FAA.2 R4.c_FR.2 TT1_FAA.1 TT1_FR.1 | length 204
  Top Layer w1: v1(99.69,19.26) 99.84,19.11 99.84,15.67 101.65,13.86 v1(161.43,13.86) ; C2_FAA.2@180.894,37.697 180.894,37.731 185.43,42.267 185.43,42.377 v1(189.08,46.027)
  Bottom Layer w1: TT1_FR.1@93.034,20.677 95.794,20.677 98.927,23.81 C2_FR.2@98.927,30.017 ; R4.c_FR.2@95.06,30.087 95.17,30.197 98.927,30.197 C2_FR.2@98.927,30.017 ; C2_FR.2@98.894,30.017 C2_FR.2@98.927,30.017 ; v1(99.69,19.26) 100.64,19.26 100.7,19.2 102.67,19.2 Jumper1_FR.2@103.01,18.86 104.54,18.86 105.6,19.92 105.6,24.24 102.484,27.356 102.484,29.377 101.844,30.017 C2_FR.2@98.927,30.017 ; v1@161.635,13.885 167.38,13.885 168.763,12.503 R4.c_FAA.2@168.763,10.237 179.3,10.237 190.46,21.397 190.46,44.867 v1@189.35,45.977 ; Jumper1_FAA.2@172.49,51.217 172.49,52.417 174.61,54.537 180.57,54.537 v1(189.08,46.027) ; TT1_FAA.1@179.924,33.916 180.894,34.886 C2_FAA.2@180.894,37.697
Vo(J2): C4_FAA.2 C4_FR.2 Jumper2_FAA.2 Jumper2_FR.2 R7_FAA.2 R7_FR.2 TT1_FAA.8 TT1_FR.8 | length 149.3
  Top Layer w1: v1(80.494,4.337) v1(90.474,4.337) ; C4_FAA.2@161.86,22.387 164.14,20.107 166.177,20.107 168.33,17.954 168.33,12.45 163.93,8.05 v1(163.93,6.11)
  Bottom Layer w1: C4_FR.2@72.524,14.457 73.964,13.017 77.754,13.017 TT1_FR.8@77.794,13.057 77.794,7.647 78.854,6.587 R7_FR.2@80.394,6.587 80.494,6.487 v1(80.494,4.337) ; Jumper2_FR.2@90.404,7.517 v1(90.474,4.337) 162.223,4.337 v1@163.93,6.044 ; R7_FAA.2@157.1,21.304 160.137,21.304 161.22,22.387 C4_FAA.2@161.86,22.387 161.86,23.472 TT1_FAA.8@164.684,26.296 ; v1(163.93,6.11) v1@163.93,6.044 ; Jumper2_FAA.2@171.94,3.637 171.94,2.904 170.772,1.737 166.783,1.737 166.63,1.89 164.67,1.89 163.93,2.63 v1@163.93,6.044
Vo(J3): C6_FAA.2 C6_FR.2 Jumper3_FAA.2 Jumper3_FR.2 R11_FAA.1 R11_FR.1 TT2_FAA.1 TT2_FR.1 | length 130.3
  Top Layer w1: v1(160.62,96.12) 169.427,96.12 169.687,95.86 169.904,96.077 C6_FAA.2@175.084,90.897
  Bottom Layer w1: Jumper3_FR.2@96.524,91.797 96.524,94.144 97.63,95.25 116.79,95.25 126.13,85.91 ; C6_FR.2@109.024,80.304 109.024,76.863 TT2_FR.1@108.972,76.811 113.007,76.811 114.004,75.814 ; R11_FR.1@114.004,74.074 114.004,75.814 ; Jumper3_FAA.2@160.99,93.227 161.14,93.377 160.62,93.897 v1(160.62,96.12) 152.734,96.12 152.474,95.86 152.257,96.077 141.56,85.38 126.66,85.38 126.13,85.91 ; R11_FAA.1@174.133,83.717 174.133,87.999 TT2_FAA.1@174.294,88.16 175.084,88.95 C6_FAA.2@175.084,90.897 ; 114.004,75.814 114.004,76.094 123.82,85.91 126.13,85.91
Vo(J4): C8_FAA.2 C8_FR.2 Jumper4_FAA.2 Jumper4_FR.2 R23_FAA.2 R23_FR.2 TT2_FAA.8 TT2_FR.8 | length 125.5
  Top Layer w1: C8_FR.2@92.594,64.744 94.51,66.66 145.64,66.66 150.307,71.327 C8_FAA.2@156.264,71.327
  Bottom Layer w1: TT2_FR.8@93.732,69.191 92.594,68.053 C8_FR.2@92.594,64.744 93.851,63.487 R23_FR.2@93.851,60.954 92.631,60.954 91.434,59.757 91.434,53.657 94.654,50.437 Jumper4_FR.2@99.944,50.437 ; TT2_FAA.8@159.054,80.54 159.131,80.463 R23_FAA.2@159.131,78.257 156.32,78.257 155.02,76.957 155.02,72.57 C8_FAA.2@156.264,71.327 157.77,71.327 162.89,66.207 169.69,66.207 170.16,66.677 Jumper4_FAA.2@170.16,68.407
Vo(J5): Jumper5_FAA.2 Jumper5_FR.2 R21_FAA.2 R21_FR.2 R22.b_FAA.2 R22.b_FR.2 R22_FAA.2 R22_FR.2 TT3_FAA.8 TT3_FR.8 | length 178.2
  Top Layer w1: v1(54.771,45.224) 78.324,45.224 79.447,46.347 85.23,46.347 ; v1(80.4,64.98) 80.4,59.87 88.35,51.92 88.35,49.467 85.23,46.347 ; v1(130.974,49.517) 128.404,49.517 ; v1(140.854,41.997) 140.154,42.697 128.344,42.697 126.554,44.487 126.554,47.667 128.404,49.517 ; 85.23,46.347 87.443,46.347 88.79,45 89.53,45 89.718,44.812 90.989,44.812 91.219,45.042 94.339,45.042 94.434,44.947 95.594,44.947 95.689,45.042 99.776,45.042 102.014,47.28 102.014,49.394 102.137,49.517 102.271,49.517 103.314,50.56 127.36,50.56 128.404,49.517
  Bottom Layer w1: TT3_FR.8@54.592,50.85 54.771,50.671 R21_FR.2@54.771,48.057 v1(54.771,45.224) ; R22_FR.2@64.364,74.151 64.417,74.204 R22.b_FR.2@67.064,74.204 67.064,73.277 68.464,71.877 69.454,71.877 70.354,70.977 70.354,69.45 70.414,69.39 70.414,66.727 72.114,65.027 Jumper5_FR.2@75.644,65.027 v1@80.357,65.027 ; R22.b_FAA.2@130.757,46.597 131.127,46.967 R21_FAA.2@133.441,46.967 ; v1@131.213,49.376 TT3_FAA.8@133.814,49.376 133.814,47.34 R21_FAA.2@133.441,46.967 ; R22_FAA.2@133.441,44.567 R21_FAA.2@133.441,46.967 ; v1(140.854,41.997) 141.674,41.177 141.674,37.257 143.454,35.477 146.684,35.477 147.944,36.737 Jumper5_FAA.2@147.944,37.597
vref1: R4.1 R7.1 U12.3 | length 12.5
  Bottom Layer w1: U12.3@142.444,190.187 145.238,190.187 147.397,188.028 R7.1@147.397,187.52 146.254,186.377 R4.1@146.254,181.805
vref2: R5.1 R6.1 U13.3 | length 6.8
  Bottom Layer w1: U13.3@142.83,175.134 142.977,175.134 143.981,174.13 146.136,174.13 R6.1@146.51,174.504 ; R5.1@146.51,176.914 R6.1@146.51,174.504 ; R6.1@146.64,174.374 R6.1@146.51,174.504
pads on no net: R13_FAA.3 R13_FR.3 Rb-3.2 Rcomp1.1 Rcomp2.1 Rf2.1 U10.3 U12.5 U12.6 U13.5 U13.6 Unot1.4 Unot1.6 Unot1.8 Unot1.10 Unot1.12